# Altium PCB Copy of pcbSensorChassiNano.PcbDoc
Units mil, origin at the board's own origin, x right, y up, seen from the top; angles counter-clockwise.
Board outline 6000 x 4000 mil, 2 copper layers (Top Layer, Bottom Layer); 27 components, 37 nets, 190 pads, 0 vias.
Unrouted connection lines stored in the file: 98.
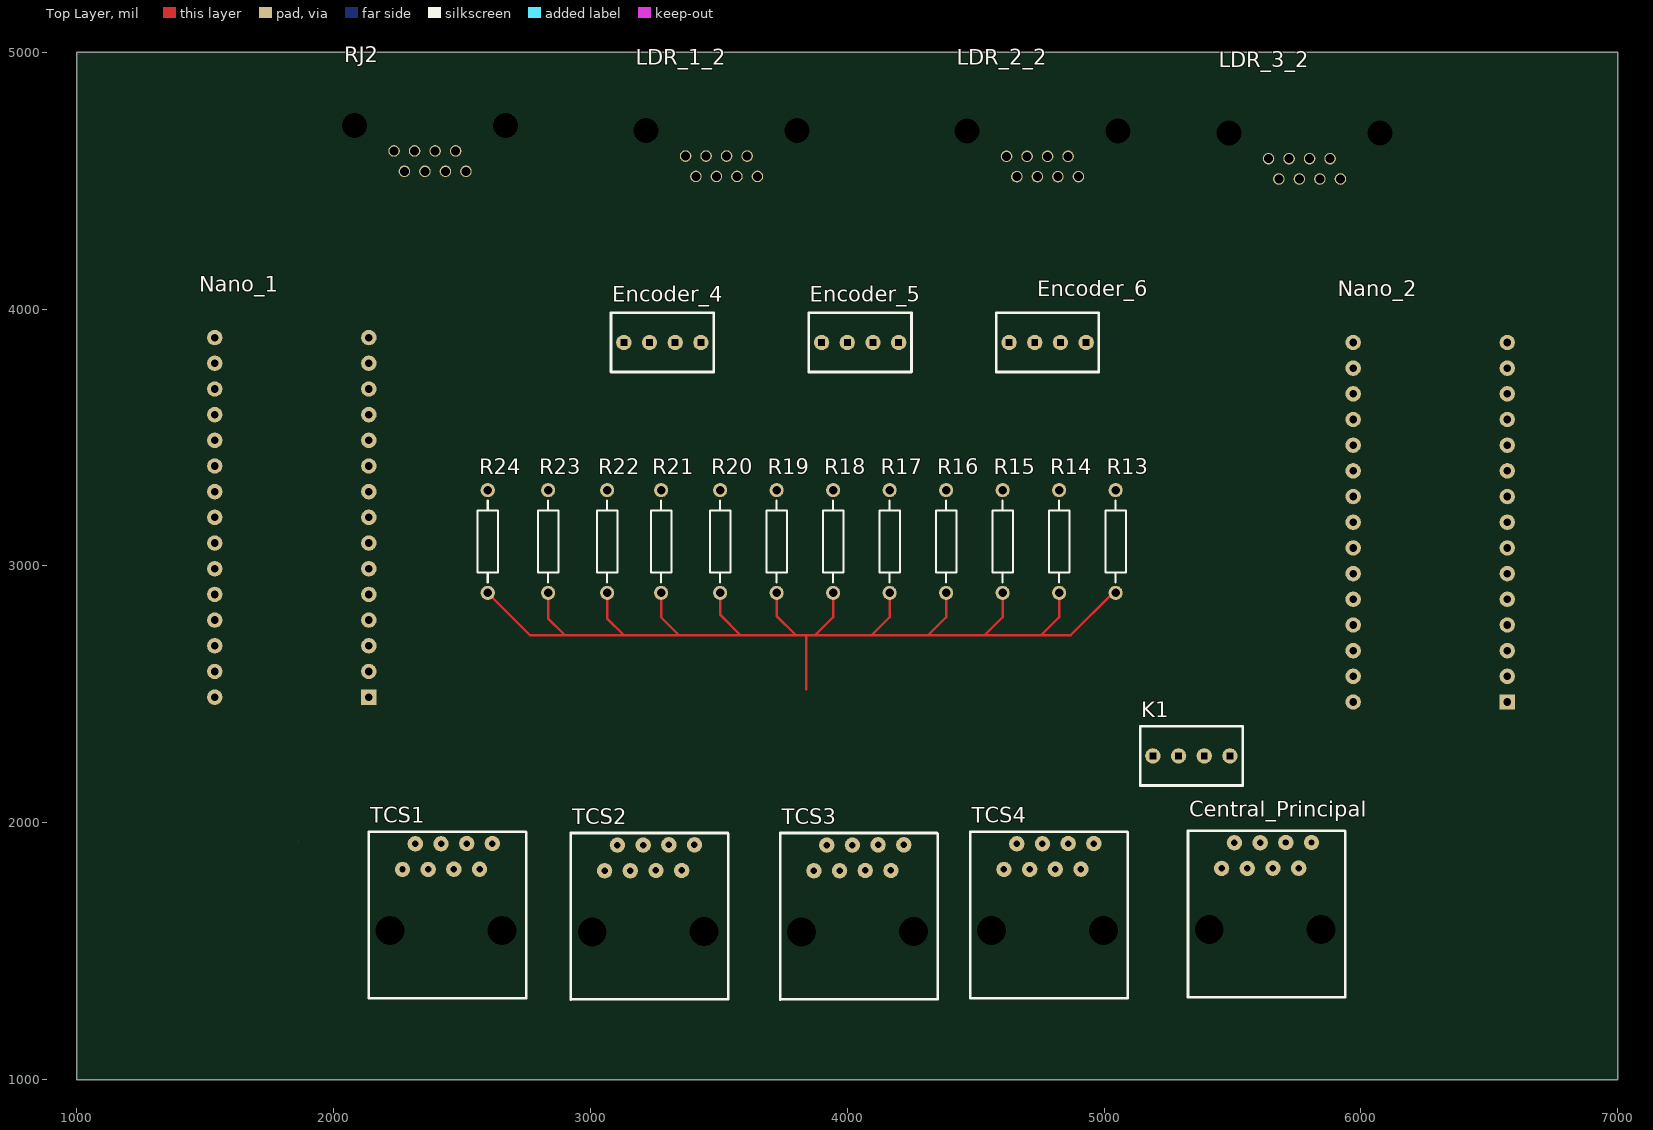
[diagram p0: Top Layer view]
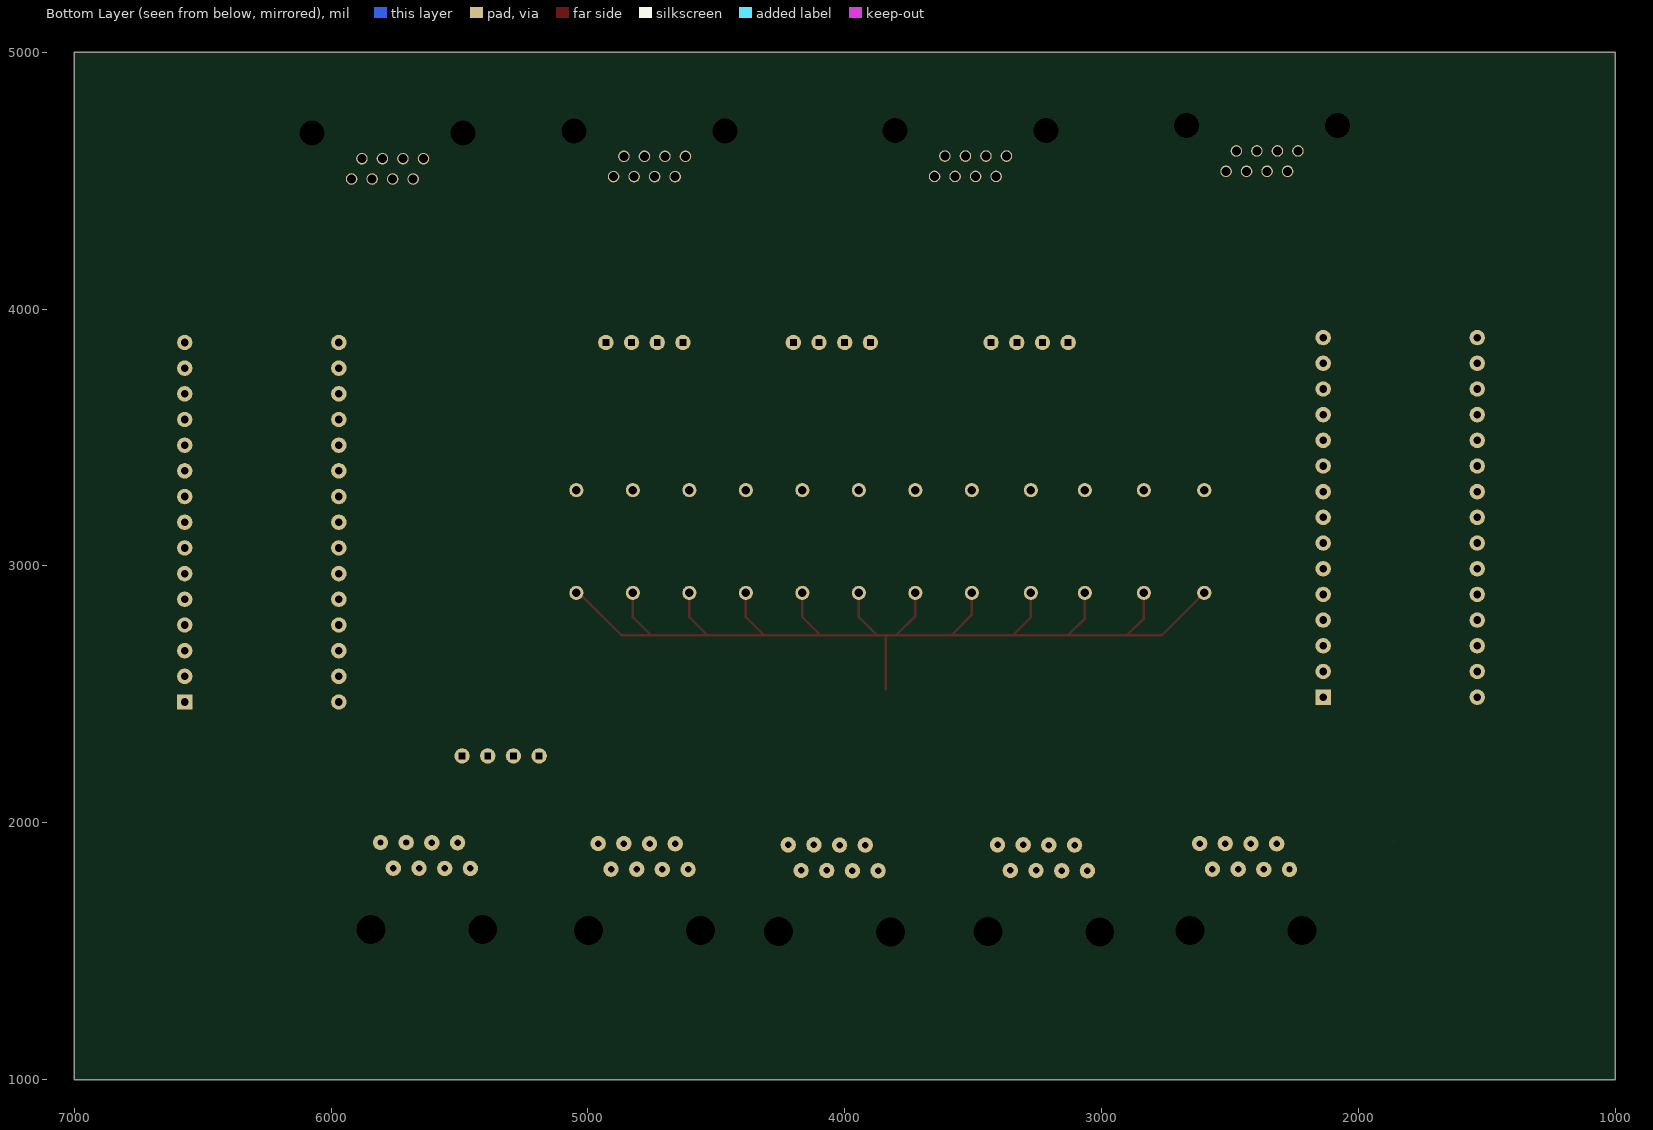
[diagram p1: Bottom Layer view, seen from below]

## Layer stack, top to bottom
Top Solder: solder mask 0.4, Solder Resist, Dk 3.5
Top Layer: signal copper 1.4
Dielectric 1: dielectric 12.6, FR-4, Dk 4.8
Bottom Layer: signal copper 1.4
Bottom Solder: solder mask 0.4, Solder Resist, Dk 3.5

## Board outline
1000,1000 7000,1000 7000,5000 1000,5000
cut-out: 3840,2730
cut-out: 3835,2730
cut-out: 1865,1925
cut-out: 7600,4735
cut-out: 1010,4990

## Design rules (kind name [scope] priority, off if disabled: settings)
Clearance [All] p1: gap=10 ignorepadtopadclearanceinfootprint=FALSE except(0: Arc-Hole Track-Hole SMDPad-Hole THPad-Hole Via-Hole Fill-Hole Poly-Hole Region-Hole Text-Hole)
PolygonConnect [All] p1: connectstyle=Relief reliefconductorwidth=10 reliefentries=4 polygonreliefangle="90 Angle" airgapwidth=10
RoomDefinition schSensorChassiNano [InComponentClass('schSensorChassiNano')] p1: confinementstyle=ConfineIn formatcopy=TRUE lockcomponents=FALSE outline 17780,1040 19875,1040 19875,2880 17780,2880
RoutingVias [All] p1: holewidth=28 width=50 viastyle="Through Hole" minholewidth=28 minwidth=50 maxholewidth=28 maxwidth=50
SolderMaskExpansion [All] p1: expansion=4
Width [All] p1: maxlimit=15 minlimit=10 preferedwidth=15 minimp=50.000000 maximp=50.000000 favimp=50.000000
30 further rules are at their usual default settings.

## Components (designator, comment, footprint, x,y, rotation, side; value= is the part's Value field where it differs from the comment)
Central_Principal "RJ45" RJ45_90 5817.6,1464 r180 top
Encoder_4 "Encoder_3" 4-vias 3130,3870 r90 top
Encoder_5 "Encoder_2" 4-vias 3900,3870 r90 top
Encoder_6 "Encoder1" 4-vias 4630,3870 r90 top
K1 "Encoder_4" 4-vias 5190,2260 r90 top
LDR_1_2 "RJ45" RJ45_Simples 3760,4695 r180 top
LDR_2_2 "RJ45" RJ45_Simples 5009.84,4694.21 r180 top
LDR_3_2 "RJ45" RJ45_Simples 6030,4685 r180 top
Nano_1 "Nano" Arduino_Nano 1825,3165 r90 top
Nano_2 "Nano" Arduino_Nano 6258,3146 r90 top
R13 "Res2" AXIAL-0.4 5045,3095 r270 top value=1K
R14 "Res2" AXIAL-0.4 4825,3095 r270 top value=1K
R15 "Res2" AXIAL-0.4 4605,3095 r270 top value=1K
R16 "Res2" AXIAL-0.4 4385,3095 r270 top value=1K
R17 "Res2" AXIAL-0.4 4165,3095 r270 top value=1K
R18 "Res2" AXIAL-0.4 3945,3095 r270 top value=1K
R19 "Res2" AXIAL-0.4 3725,3095 r270 top value=1K
R20 "Res2" AXIAL-0.4 3505,3095 r270 top value=1K
R21 "Res2" AXIAL-0.4 3275,3095 r270 top value=1K
R22 "Res2" AXIAL-0.4 3065,3095 r270 top value=1K
R23 "Res2" AXIAL-0.4 2835,3095 r270 top value=1K
R24 "Res2" AXIAL-0.4 2600,3095 r270 top value=1K
RJ2 "RJ45" RJ45_Simples 2625,4715 r180 top
TCS1 "RJ45" RJ45_90 2628.03,1460 r180 top
TCS2 "RJ45" RJ45_90 3415,1455 r180 top
TCS3 "RJ45" RJ45_90 4230,1455 r180 top
TCS4 "RJ45" RJ45_90 4970,1460 r180 top

## Footprints (in the part's own frame and the unit in brackets; to place one, negate y for a bottom-side part, rotate by r counter-clockwise, add the part's x,y. Pads: shape width x height; smd on the part's side, far side on the other; paste and mask are expansions set on the pad)
4-vias [mil]
  round 60 hole 25.2 square: 1(0,0) 2(0,-100) 3(0,-200) 4(0,-300)
  silkscreen extent -115,-350 115,50, body extent -115,-350 115,50, height 460
Arduino_Nano [mil]
  rect 60x60 hole 30: 0(-676,-312)
  round 60 hole 30: 1(-576,-312) 2(-476,-312) 3(-376,-312) 4(-276,-312) 5(-176,-312) 6(-76,-312) 7(24,-312) 8(124,-312) 9(224,-312) 10(324,-312) 11(424,-312) 12(524,-312) 13(624,-312) 14(724,-312) 15(724,288) 16(624,288) 17(524,288) 18(424,288) 19(324,288) 20(224,288) 21(124,288) 22(24,288) 23(-76,288) 24(-176,288) 25(-276,288) 26(-376,288) 27(-476,288) 28(-576,288) 29(-676,288)
AXIAL-0.4 [mm] "Axial Device, Thru-Hole; 2 Leads; 0.4 in Pin Spacing"
  round 1.4 hole 0.85: 1(-5.08,0) 2(5.08,0)
  silkscreen extent -4.06,-1.02 4.06,1.02
RJ45_90 [mil]
  round 60 hole 25.2: 1(360,-358) 2(310,-458) 3(260,-358) 4(210,-458) 5(160,-359) 6(110,-459) 7(60,-359) 8(10,-459)
  round 60 hole 112.6: HOLE(-27.4,-121) HOLE(408.03,-120)
  silkscreen extent -122,-505 491,144, body extent -119,-505 491,145, height 630
RJ45_Simples [mil] "Sem led nessas porra - 8P8C"
  round 45 hole 35: 1(389.76,99.21) 2(349.61,178.35) 3(309.84,99.21) 4(269.68,178.35) 5(229.92,99.21) 6(189.76,178.35) 7(150,99.21) 8(109.84,178.35)
  round 0 hole 97.24: HOLE(-44.49,0) HOLE(544.49,0)
  body extent -61,-217 561,395, height 506

## Part data
Encoder_4 Encoder_5 Encoder_6 K1: library part KK4Vias, ComponentLink1Description=Fabricante, ComponentLink1URL=https://www.molex.com/molex/products/family?key=kk_254_rpc_connector_system&channel=products&chanName=family&pageTitle=Introduction&parentKey=kk_interconnect_solutions
Nano_1 Nano_2: library part Arduino_Nano
R13 R14 R15 R16 R17 R18 R19 R20 R21 R22 R23 R24: "Resistor", LatestRevisionDate=17-Jul-2002, LatestRevisionNote="Re-released for DXP Platform.", PackageDescription="Axial Device, Thru-Hole; 2 Leads; 0.4 in Pin Spacing", PackageReference=AXIAL-0.4, Published=8-Jun-2000, Publisher="Altium Limited"

## Nets (pads, with @x,y where several pads share a name; then routed paths per layer and width w, separated by ;. In a path a pad name is that pad's centre, name@x,y a point inside that pad or via, vN(x,y) a via of type N, cw(c..) or ccw(c..) an arc to the next point about the centre after c; other vN are vias at no path point)
3VCC: Central_Principal.3
5VCC: Central_Principal.2 Nano_1.29 Nano_2.11 Nano_2.29 R13.2 R14.2 R15.2 R16.2 R17.2 R18.2 R19.2 R20.2 R21.2 R22.2 R23.2 R24.2 TCS1.7 TCS1.8 TCS2.8 TCS3.8 TCS4.8 | length 4733.7
  Top Layer w10: R24.2 2765,2730 2900,2730 ; R23.2 2835,2795 2900,2730 ; R22.2 3065,2795 3130,2730 ; R21.2 3275,2800 3345,2730 ; R20.2 3505,2810 3585,2730 ; R19.2 3725,2805 3800,2730 ; 3840,2520 3840,2730 ; R18.2 3945,2800 3875,2730 ; R17.2 4165,2800 4095,2730 ; R16.2 4385,2800 4315,2730 ; R15.2 4605,2800 4535,2730 ; R14.2 4825,2800 4755,2730 ; R13.2 5035,2895 4870,2730 4755,2730 ; 2900,2730 3130,2730 ; 3130,2730 3345,2730 ; 3345,2730 3585,2730 ; 3585,2730 3800,2730 ; 3800,2730 3875,2730 ; 3875,2730 4095,2730 ; 4095,2730 4315,2730 ; 4315,2730 4535,2730 ; 4535,2730 4755,2730
GND: Central_Principal.1 Encoder_4.4 Encoder_5.4 Encoder_6.4 K1.4 LDR_1_2.2 LDR_1_2.4 LDR_1_2.6 LDR_1_2.8 LDR_2_2.2 LDR_2_2.4 LDR_2_2.6 LDR_2_2.8 LDR_3_2.2 LDR_3_2.4 LDR_3_2.6 LDR_3_2.8 Nano_1.28 Nano_2.3 Nano_2.28 TCS1.1 TCS2.1 TCS3.1 TCS4.1
NetCentral_Principal_4: Central_Principal.4 Nano_1.15 Nano_2.15
NetCentral_Principal_5: Central_Principal.5 Nano_1.14 Nano_2.14
NetCentral_Principal_6: Central_Principal.6 Nano_1.13 Nano_2.13
NetCentral_Principal_7: Central_Principal.7 Nano_1.12
NetCentral_Principal_8: Central_Principal.8 Nano_2.12
NetEncoder_4_1: Encoder_4.1 Encoder_5.1 Encoder_6.1 K1.1
NetEncoder_4_2: Encoder_4.2 RJ2.6
NetEncoder_4_3: Encoder_4.3 RJ2.5
NetEncoder_5_2: Encoder_5.2 RJ2.4
NetEncoder_5_3: Encoder_5.3 RJ2.3
NetEncoder_6_2: Encoder_6.2 RJ2.2
NetEncoder_6_3: Encoder_6.3 RJ2.1
NetK1_2: K1.2 RJ2.8
NetK1_3: K1.3 RJ2.7
NetLDR_1_2_1: LDR_1_2.1 Nano_1.22 R24.1
NetLDR_1_2_3: LDR_1_2.3 Nano_1.23 R23.1
NetLDR_1_2_5: LDR_1_2.5 Nano_1.24 R22.1
NetLDR_1_2_7: LDR_1_2.7 Nano_1.25 R21.1
NetLDR_2_2_1: LDR_2_2.1 Nano_1.21 R20.1
NetLDR_2_2_3: LDR_2_2.3 Nano_1.20 R19.1
NetLDR_2_2_5: LDR_2_2.5 Nano_1.19 R18.1
NetLDR_2_2_7: LDR_2_2.7 Nano_1.18 R17.1
NetLDR_3_2_1: LDR_3_2.1 Nano_2.23 R16.1
NetLDR_3_2_3: LDR_3_2.3 Nano_2.24 R15.1
NetLDR_3_2_5: LDR_3_2.5 Nano_2.25 R14.1
NetLDR_3_2_7: LDR_3_2.7 Nano_2.21 R13.1
NetNano_2_4: Nano_2.4 TCS1.5 TCS2.5 TCS3.5 TCS4.5
NetNano_2_5: Nano_2.5 TCS4.7
NetNano_2_6: Nano_2.6 TCS1.3 TCS2.3 TCS3.3 TCS4.3
NetNano_2_7: Nano_2.7 TCS3.7
NetNano_2_8: Nano_2.8 TCS2.7
NetNano_2_9: Nano_2.9 TCS1.2 TCS2.2 TCS3.2 TCS4.2
NetNano_2_10: Nano_2.10 TCS1.4 TCS2.4 TCS3.4 TCS4.4
NetNano_2_22: Nano_2.22 TCS1.6 TCS2.6 TCS3.6 TCS4.6
pads on no net: Central_Principal.HOLE LDR_1_2.HOLE LDR_2_2.HOLE LDR_3_2.HOLE Nano_1.0 Nano_1.1 Nano_1.2 Nano_1.3 Nano_1.4 Nano_1.5 Nano_1.6 Nano_1.7 Nano_1.8 Nano_1.9 Nano_1.10 Nano_1.11 Nano_1.16 Nano_1.17 Nano_1.26 Nano_1.27 Nano_2.0 Nano_2.1 Nano_2.2 Nano_2.16 Nano_2.17 Nano_2.18 Nano_2.19 Nano_2.20 Nano_2.26 Nano_2.27 RJ2.HOLE TCS1.HOLE TCS2.HOLE TCS3.HOLE TCS4.HOLE

## Polygon pours and split planes (outlines as drawn)
no net on Top Layer (solid, pour order 8): 6870,4545
no net on Top Layer (solid, pour order 6): 6975,4925
no net on Top Layer "Top Layer-No Net" (solid, pour order 2): 980,1030

## Other copper
Top Layer:
  pour cut-out: 990,1005